# Altium PCB PDM-P00-V00.PcbDoc
Units mil, origin at the board's own origin, x right, y up, seen from the top; angles counter-clockwise.
Board outline 4820.27 x 3160.7 mil, 2 copper layers (Top Layer, Bottom Layer), stack 61.8 mil thick; 69 components, 91 nets, 559 pads, 0 vias.
Unrouted connection lines stored in the file: 383.
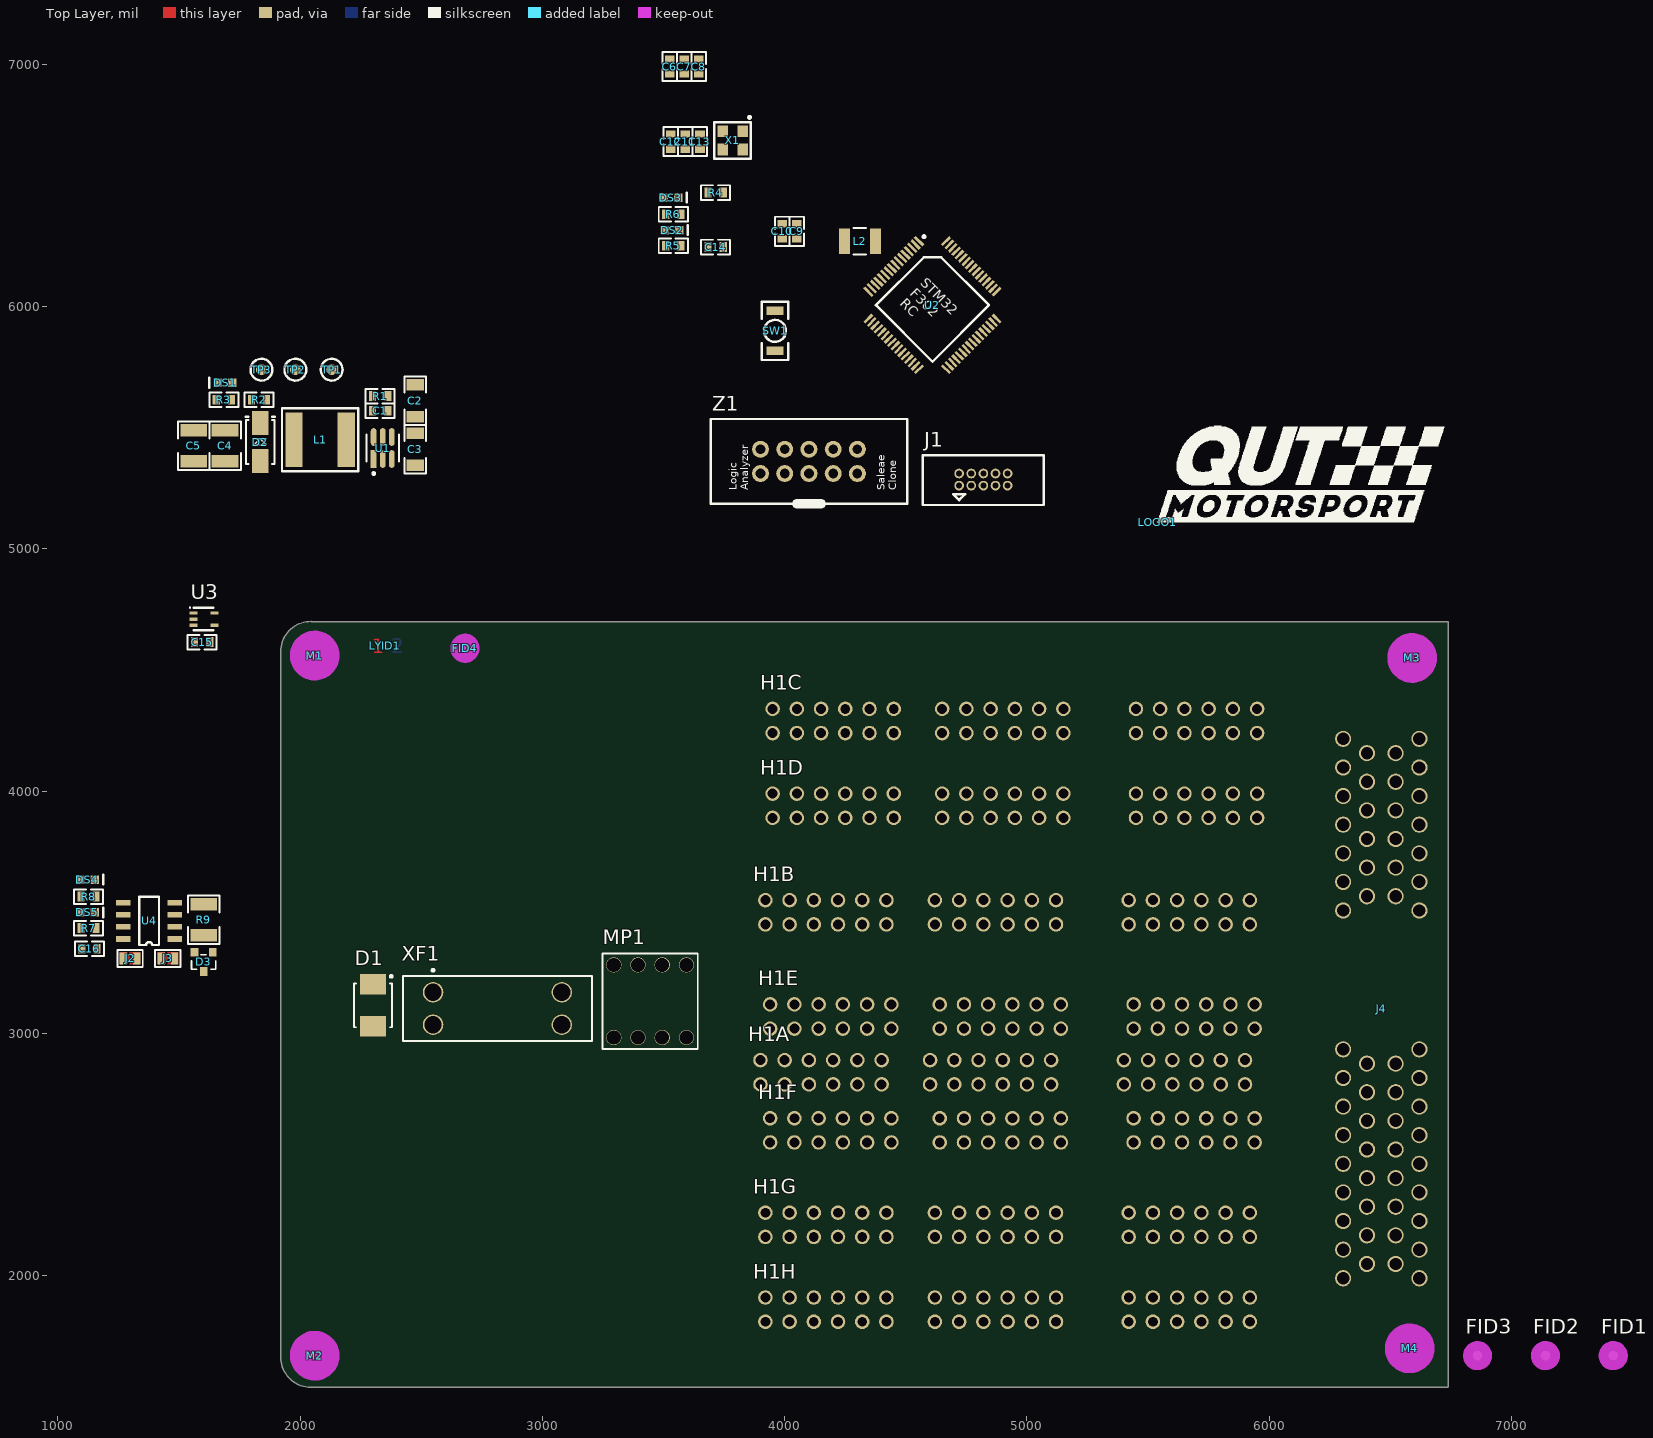
[diagram p0: Top Layer view]
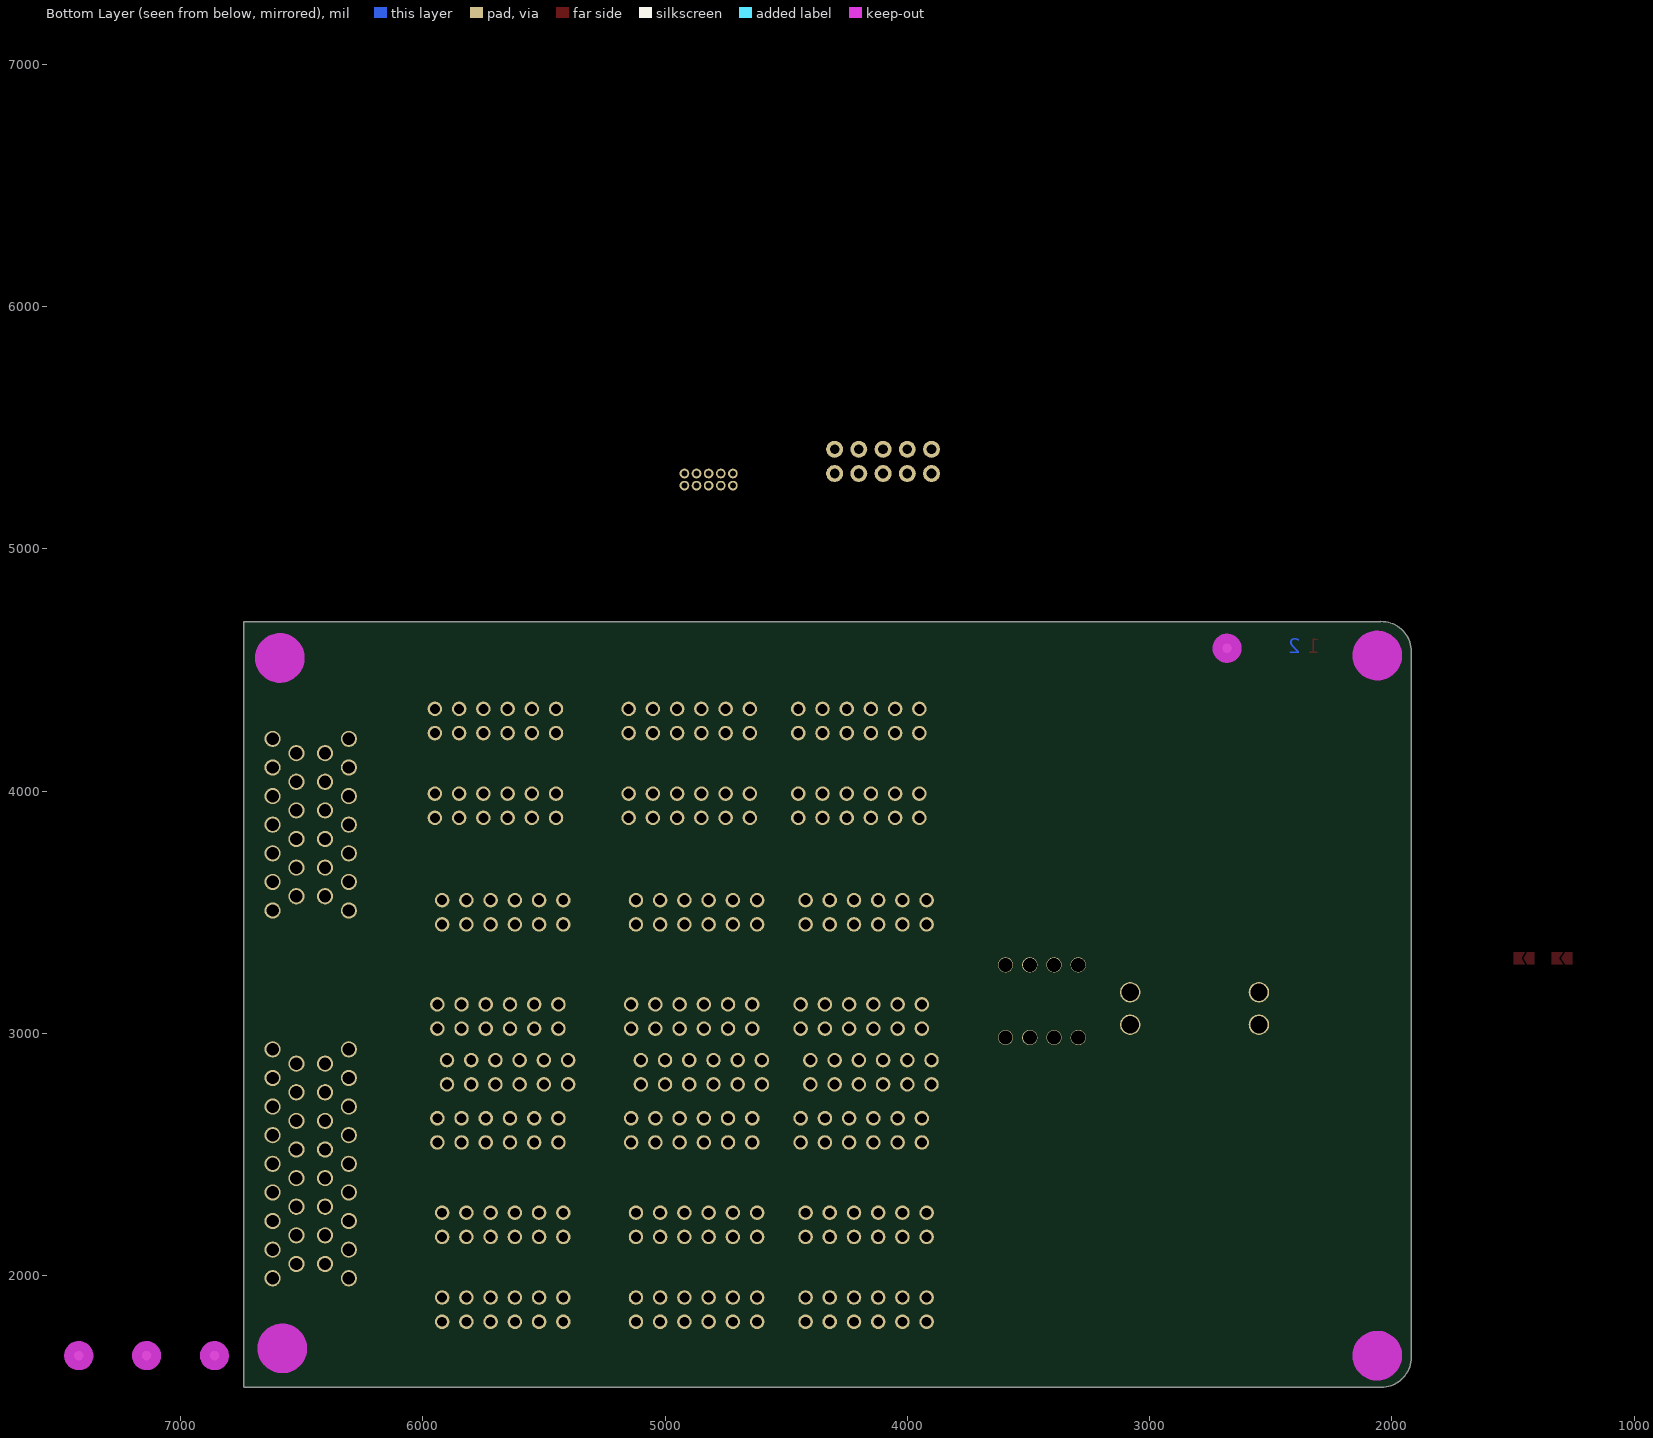
[diagram p1: Bottom Layer view, seen from below]

## Layer stack, top to bottom
Top Solder: solder mask 0.4, Solder Resist, Dk 3.5
Top Layer: signal copper 1.4
Dielectric 1: core 59, Core-043, Dk 4.3
Bottom Layer: signal copper 1.4
Bottom Solder: solder mask 0.4, Solder Resist, Dk 3.5

## Board outline
1919.75,1662.88 cw(c1924.76,1662.88) 1919.98,1664.41 1919.98,4575 cw(c1925,4575) 1920.1,4576.06 cw(c2043.22,4577.34) 2045.15,4700.45 cw(c2045.07,4695.43) 2047.11,4700.02 6735,4700.02 cw(c6735,4695) 6740.02,4695 6740.02,1545 cw(c6735,1545) 6735,1539.99 2044.38,1539.99 cw(c2042.87,1544.77) 2042.87,1539.75 cw(c2042.87,1662.88)

## Design rules (kind name [scope] priority, off if disabled: settings)
Clearance [All] p1: gap=10 ignorepadtopadclearanceinfootprint=FALSE except(0: Arc-Hole Track-Hole SMDPad-Hole THPad-Hole Via-Hole Fill-Hole Poly-Hole Region-Hole Text-Hole)
PolygonConnect [All] p1: connectstyle=Relief reliefconductorwidth=10 reliefentries=4 polygonreliefangle="90 Angle" airgapwidth=10
RoomDefinition PDM-S08-V00-PDMCConnector5 [InComponentClass('PDM-S08-V00-PDMCConnector5')] p1: confinementstyle=ConfineIn formatcopy=TRUE lockcomponents=FALSE outline 975,5041.01 2975,5041.01 2975,6041.01 975,6041.01
RoomDefinition PDM-S08-V00-PDMCConnector4 [InComponentClass('PDM-S08-V00-PDMCConnector4')] p2: confinementstyle=ConfineIn formatcopy=TRUE lockcomponents=FALSE outline 1525,4565.59 1685,4565.59 1685,4775.59 1525,4775.59
RoutingVias [All] p1: holewidth=28 width=50 viastyle="Through Hole" minholewidth=28 minwidth=50 maxholewidth=28 maxwidth=50
SolderMaskExpansion [All] p1: expansion=4 istentingtop=FALSE
Width [All] p1: maxlimit=60 minlimit=10 preferedwidth=20 minimp=50.000000 maximp=50.000000 favimp=50.000000
30 further rules are at their usual default settings.

## Classes and differential pairs
channel class PDM-S08-V00-PDMCConnector: PDM-S08-V00-PDMCConnector1 PDM-S08-V00-PDMCConnector2 PDM-S08-V00-PDMCConnector3 PDM-S08-V00-PDMCConnector4 PDM-S08-V00-PDMCConnector5 PDM-S08-V00-PDMCConnector6 PDM-S08-V00-PDMCConnector7 PDM-S08-V00-PDMCConnector8
net class "INPUT CH[1..7]": "INPUT CH1" "INPUT CH2" "INPUT CH3" "INPUT CH4" "INPUT CH5" "INPUT CH6" "INPUT CH7"
component class PDM-S05-V00-TempSensor: C15 U3
component class PDM-S02-V00-BatteryProtection: D1 MP1 XF1
net class "PDMC CS[1..8]": "PDMC CS1" "PDMC CS2" "PDMC CS3" "PDMC CS4" "PDMC CS5" "PDMC CS6" "PDMC CS7" "PDMC CS8"
net class "PDMC CH4[1..8]": "PDMC CH41" "PDMC CH42" "PDMC CH43" "PDMC CH44" "PDMC CH45" "PDMC CH46" "PDMC CH47" "PDMC CH48"
net class "PDMC CH3[1..8]": "PDMC CH31" "PDMC CH32" "PDMC CH33" "PDMC CH34" "PDMC CH35" "PDMC CH36" "PDMC CH37" "PDMC CH38"
net class "PDMC CH2[1..8]": "PDMC CH21" "PDMC CH22" "PDMC CH23" "PDMC CH24" "PDMC CH25" "PDMC CH26" "PDMC CH27" "PDMC CH28"
net class "PDMC CH1[1..8]": "PDMC CH11" "PDMC CH12" "PDMC CH13" "PDMC CH14" "PDMC CH15" "PDMC CH16" "PDMC CH17" "PDMC CH18"
net class "PDMC ANALOG[1..8]": "PDMC ANALOG1" "PDMC ANALOG2" "PDMC ANALOG3" "PDMC ANALOG4" "PDMC ANALOG5" "PDMC ANALOG6" "PDMC ANALOG7" "PDMC ANALOG8"
component class PDM-S08-V00-PDMCConnector8: H1H
component class PDM-S08-V00-PDMCConnector7: H1G
component class PDM-S08-V00-PDMCConnector6: H1F
component class PDM-S08-V00-PDMCConnector5: H1E
component class PDM-S08-V00-PDMCConnector4: H1D
component class PDM-S08-V00-PDMCConnector3: H1C
component class PDM-S08-V00-PDMCConnector2: H1B
component class PDM-S08-V00-PDMCConnector1: H1A
component class PDM-S03-V00-PSU: C1 C2 C3 C4 C10 D2 DS1 L2 R1 R2 R3 TP1 TP2 TP3 U1
component class PDM-S01-V00-PowerDistributionModule: FID1 FID2 FID3 FID4 LOGO1 LYID1 M1 M2 M3 M4
component class PDM-S04-V00-Microcontroller: C1 C3 C4 C6 C8 C10 C12 DS3 J1 L2 R3 R5 R7 SW1 U3 X1 Z1
component class PDM-S09-V00-HarnessConnector: J3
component class PDM-S06-V00-CAN: C15 D1 DS5 J1 J3 R2 R3 R7 U3

## Components (designator, comment, footprint, x,y, rotation, side; value= is the part's Value field where it differs from the comment)
C1 "100nF 100V" Cap_Ceramic_0603 2330,5571.01 r180 top
C2 "22uF 35V 1206" Cap_Ceramic_1206 2475,5611.01 r90 top
C3 "22uF 35V 1206" Cap_Ceramic_1206 2475,5411.01 r270 top
C4 "47uF 16V 1210" Cap_Ceramic_1210 1690,5426.01 r90 top
C5 "47uF 16V 1210" Cap_Ceramic_1210 1560,5426.01 r90 top
C6 "100nF" Cap_Ceramic_0603 3525,6991.24 r90 top
C7 "100nF" Cap_Ceramic_0603 3585,6991.24 r90 top
C8 "100nF" Cap_Ceramic_0603 3645,6991.24 r90 top
C9 "100nF" Cap_Ceramic_0603 4050,6311.24 r90 top
C10 "4u7" Cap_Ceramic_0603 3990,6311.24 r90 top
C11 "10nF" Cap_Ceramic_0603 3590,6681.24 r270 top
C12 "1uF" Cap_Ceramic_0603 3530,6681.24 r270 top
C13 "100nF" Cap_Ceramic_0603 3650,6681.24 r270 top
C14 "100nF" Cap_Ceramic_0603 3715,6246.24 r180 top
C15 "100nF" Cap_Ceramic_0603 1595,4615.59 r0 top
C16 "100nF" Cap_Ceramic_0603 1130,3350 r0 top
D1 "MURS360BT3G" ONSC-SMB-2-403A-03_V 2300,3116.14 r270 top
D2 "B260A-13-F" SMA 1835,5441.01 r90 top
D3 "NUP2105L" NUP2105L 1601.32,3294.93 r180 top
DS1 "LED Green 0603" "LED GREEN 0603" 1690,5686.01 r180 top
DS2 "LED Orange" "LED ORANGE 0603" 3535,6316.24 r0 top
DS3 "LED Orange" "LED ORANGE 0603" 3530,6450 r0 top
DS4 "LED Blue 0603" "LED BLUE 0603" 1121.32,3634.93 r0 top
DS5 "LED Blue 0603" "LED BLUE 0603" 1121.32,3499.93 r0 top
FID1 "Fiducial 1MM" "FIDUCIAL 1MM" 7420,1670 r0 top
FID2 "Fiducial 1MM" "FIDUCIAL 1MM" 7140,1670 r90 top
FID3 "Fiducial 1MM" "FIDUCIAL 1MM" 6860,1670 r90 top
FID4 "Fiducial 1MM" "FIDUCIAL 1MM" 2680,4590 r90 top
H1A "SSW-106-01" SSW-106-01 3900,2890 r0 top (schematic designator H1)
H1B "SSW-106-01" SSW-106-01 3920,3550 r0 top (schematic designator H1)
H1C "SSW-106-01" SSW-106-01 3950,4340 r0 top (schematic designator H1)
H1D "SSW-106-01" SSW-106-01 3950,3990 r0 top (schematic designator H1)
H1E "SSW-106-01" SSW-106-01 3940,3120 r0 top (schematic designator H1)
H1F "SSW-106-01" SSW-106-01 3940,2650 r0 top (schematic designator H1)
H1G "SSW-106-01" SSW-106-01 3920,2260 r0 top (schematic designator H1)
H1H "SSW-106-01" SSW-106-01 3920,1910 r0 top (schematic designator H1)
J1 "IDC 10P 2x5 1.27mm" "IDC 1.27MM 10P" 4820,5286.24 r0 top
J2 "Jumper 2Way Solderable" Jumper_2Way_Solderable 1270,3310 r270 top
J3 "Jumper 2Way Solderable" Jumper_2Way_Solderable 1426.32,3309.93 r270 top
J4 "3-6437285-2" "SUPER SEAL RIGHT 60POS" 6620,3221.89 r90 top
L1 "74404064221" Inductor_6x6mm 2080,5451.01 r0 top
L2 "10uH" TDK-B82422A1103K100_V 4310,6270 r0 top
LOGO1 "30mm Wide QUTMS Logo" "QUTMS LOGO 30MM" 5540,5110 r0 top
LYID1 "2 Layer Identification PCB Marker" "LAYER IDENT 2" 2350,4600 r0 top
M1 "Hole M3 Tight Unplated" "M3.2 UNPLATED" 2060,4560 r0 top
M2 "Hole M3 Tight Unplated" "M3.2 UNPLATED" 2060,1670 r0 top
M3 "Hole M3 Tight Unplated" "M3.2 UNPLATED" 6590,4550 r0 top
M4 "Hole M3 Tight Unplated" "M3.2 UNPLATED" 6580,1700 r0 top
MP1 "M6x9mm" "7461084_for chemical surfaces" 3444.25,3133.07 r0 top
R1 "64k9 1%" Res_ThinFilm_0603 2330,5631.01 r0 top
R2 "1k" Res_ThinFilm_0603 1830,5616.01 r0 top
R3 "19k6 1%" Res_ThinFilm_0603 1685,5616.01 r0 top
R4 "4k7" Res_ThinFilm_0603 3715,6471.24 r180 top
R5 "330R" Res_ThinFilm_0603 3540,6251.24 r180 top
R6 "330R" Res_ThinFilm_0603 3540,6381.24 r180 top
R7 "330R" Res_ThinFilm_0603 1126.32,3434.93 r0 top
R8 "330R" Res_ThinFilm_0603 1126.32,3564.93 r0 top
R9 "120R 1% 1210" Res_ThinFilm_1210 1601.32,3469.93 r270 top
SW1 "B3U-1000P" "BTN B3U-1000P" 3960,5900 r270 top
TP1 "TestPoint_SMD" TestPointSMD 2130,5740 r0 top
TP2 "TestPoint_SMD" TestPointSMD 1980,5740 r0 top
TP3 "TestPoint_SMD" TestPointSMD 1840,5740 r0 top
U1 "LMR14010" LMR14010 2340,5416.01 r90 top
U2 "STM32F302RC" STM32F302RC 4610,6006.24 r315 top
U3 "TMP235" SC70 1605,4715.59 r0 top
U4 "SN65HVD233" SN65HVD233DR 1376.32,3464.93 r180 top
X1 "DSC1001DI1-008.0000T" DSC1001DI1-008.0000TCT-ND 3785,6686.24 r270 top
XF1 "3557-2" KSTN-3557-2 2814.25,3103.07 r0 top
Z1 "LogicAnalyzerBreakOut" LogicAnalyzer 4100,5361.24 r90 top

## Footprints (in the part's own frame and the unit in brackets; to place one, negate y for a bottom-side part, rotate by r counter-clockwise, add the part's x,y. Pads: shape width x height; smd on the part's side, far side on the other; paste and mask are expansions set on the pad)
"7461084_for chemical surfaces" [mm] "WP-BUTR Bushes with two Rows Pin-Plate, M6, blind 9mm"
  round 1.6 hole 1.475: 1(-3.81,-3.81) 1(-3.81,3.81) 1(-1.27,-3.81) 1(-1.27,3.81) 1(1.27,-3.81) 1(1.27,3.81) 1(3.81,-3.81) 1(3.81,3.81)
  silkscreen extent -5,-5 5,5, body extent -5,-5 5,5, height 13.5
"BTN B3U-1000P" [mil] "OMRON B3U-1000P"
  rect 35x70 smd: 1(-82.68,0) 2(82.68,0)
  silkscreen extent -120,-55 120,55, body extent -79,-49 79,49, height 63
Cap_Ceramic_0603 [mil]
  rect 30x40 smd: 1(-31.24,0) 2(31.24,0)
  silkscreen extent -60,-30 60,30, body extent -31,-16 32,16, height 33
Cap_Ceramic_1206 [mil]
  rect 47x71 smd: 1(-66.08,0) 2(66.08,0)
  silkscreen extent -100,-45 100,45, body extent -63,-31 63,32, height 53
Cap_Ceramic_1210 [mm]
  rect 1.3x2.8 smd: 1(-1.625,0) 2(1.625,0)
  silkscreen extent -2.54,-1.65 2.54,1.65, body extent -1.6,-1.25 1.6,1.25, height 1.35
DSC1001DI1-008.0000TCT-ND [mil]
  rect 48x43 smd: 1(-37.4,41.34) 2(37.4,41.34) 3(37.4,-41.34) 4(-37.4,-41.34)
  silkscreen extent -100,-75 75,75, body extent -49,-63 49,63, height 33
"FIDUCIAL 1MM" [mm]
  round 1 smd mask+1: 1(0,0)
  round 1 smd far side mask+1: 1(0,0)
  Keep-Out Layer circle w1.524: c0,0 r0.762
"IDC 1.27MM 10P" [mil]
  round 40 hole 25: 1(-100,-25) 2(-100,25) 3(-50,-25) 4(-50,25) 5(0,-25) 6(0,25) 7(50,-25) 8(50,25) 9(100,-25) 10(100,25)
  silkscreen extent -250,-105 250,100, body extent -249,-104 249,100, height 214
Inductor_6x6mm [mm]
  rect 1.8x5.7 smd: 1(-2.667,0) 2(2.794,0)
  silkscreen extent -3.94,-3.3 4.06,3.3, body extent -3,-3 3,3, height 4.56
Jumper_2Way_Solderable [mil]
  rect 50x30 smd: 1(0,55) 2(0,0)
  Top Layer region: -25,25 0,40 25,25 25,70 -25,70
  Top Layer region: -25,15 0,30 25,15 25,-15 0,-15 -25,-15
  silkscreen extent -35,-25 35,80
KSTN-3557-2 [mm] "Fuse Holder, PCB Mount, Thru-Hole, Body 19.8x6.8mm, Height 7.4mm"
  round 2.15 hole 1.8: 1(-6.75,1.7) 2(-6.75,-1.7) 3(6.75,1.7) 4(6.75,-1.7)
  silkscreen extent -9.9,-3.4 9.9,4.12, body extent -9.91,-3.37 9.91,3.37, height 7.74
"LAYER IDENT 2" [mil]
  Top Layer pour cut-out: -20,-5
  Top Layer pour cut-out: -10,30
  Top Layer pour cut-out: -90,50 -90,-50 90,-50 90,50
  Top Layer pour cut-out: 190,150
  Bottom Layer pour cut-out: -90,50 -90,-50 90,-50 90,50
"LED BLUE 0603" [mil]
  rect 35x35 smd: 1(-30,0) 2(30,0)
  silkscreen extent 65,-20 65,20, body extent -40,-20 40,20, height 30
"LED GREEN 0603" [mil]
  rect 35x35 smd: 1(-30,0) 2(30,0)
  silkscreen extent 65,-20 65,20, body extent -40,-20 40,20, height 30
"LED ORANGE 0603" [mil]
  rect 35x35 smd: 1(-30,0) 2(30,0)
  silkscreen extent 65,-20 65,20, body extent -40,-20 40,20, height 30
LMR14010 [mil]
  rect 73.01x24.1 smd paste+0 mask+0: 1(-44.73,36.75)
  rrect100% 73.01x24.1 smd paste+0 mask+0: 2(-44.73,-0.65) 3(-44.73,-38.05) 4(45.84,-38.05) 5(45.84,-0.65) 6(45.84,36.75)
  silkscreen extent -110,-68 56,66, body extent -101,-77 102,76, height 10
LogicAnalyzer [mil]
  round 70 hole 40: 1(-50,200) 2(50,200) 3(-50,100) 4(50,100) 5(-50,0) 6(50,0) 7(-50,-100) 8(50,-100) 9(-50,-200) 10(50,-200)
  silkscreen extent -175,-405 175,405, body extent -175,-404 175,404, height 359
"M3.2 UNPLATED" [mm]
  round 0 hole 3.2 unplated mask+2.6: 1(0,0)
  Keep-Out Layer circle w2.667: c0,0 r1.27
NUP2105L [mm]
  rect 0.8x0.9 smd: 1(-0.95,-1) 2(0.95,-1) 3(0,1)
  silkscreen extent -1.27,-0.76 1.27,0.76, body extent -1.45,-1.22 1.45,1.18, height 1
ONSC-SMB-2-403A-03_V [mil] "Molded, 2-Leads, Body 4.6x3.95mm"
  rect 85x107.99 smd: 1(-87.01,0) 2(87.01,0)
  silkscreen extent -125,-79 91,81, body extent -91,-78 91,78, height 97
"QUTMS LOGO 30MM" [mil]
  silkscreen extent -1,1 1182,398
Res_ThinFilm_0603 [mil]
  rect 30x40 smd: 1(-31.24,0) 2(31.24,0)
  silkscreen extent -60,-30 60,30, body extent -31,-16 32,16, height 18
Res_ThinFilm_1210 [mm]
  rect 1.3x2.8 smd: 1(-1.625,0) 2(1.625,0)
  silkscreen extent -2.54,-1.65 2.54,1.65, body extent -1.6,-1.25 1.6,1.25, height 0.6
SC70 [mm] "SC70, 5-leads"
  rect 0.85x0.35 smd: 1(-1.143,0.508) 2(-1.143,-0.142) 3(-1.143,-0.792) 4(1.057,-0.792) 5(1.057,0.508)
  silkscreen extent -1.59,-1.32 0.94,1.13, body extent -1.14,-1.13 0.96,0.87, height 0.9
SMA [mm]
  rect 2.5x1.7 smd: A(-2,0) K(2,0)
  silkscreen extent -2.3,-1.52 2.67,1.52, body extent -2.52,-1.46 2.52,1.46, height 2.4
SN65HVD233DR [mm]
  rect 1.55x0.6 smd: 1(-2.7,1.903) 2(-2.7,0.633) 3(-2.7,-0.637) 4(-2.7,-1.907) 5(2.7,-1.907) 6(2.7,-0.637) 7(2.7,0.633) 8(2.7,1.903)
  silkscreen extent -1.04,-2.54 1.04,2.54, body extent -3.01,-2.45 3.01,2.45, height 1.63
SSW-106-01 [mil]
  round 60 hole 40.94: A1(0,0) A2(100,0) A3(200,0) A4(300,0) A5(400,0) A6(500,0) B1(0,-100) B2(100,-100) B3(200,-100) B4(300,-100) B5(400,-100) B6(500,-100) C1(700,0) C2(800,0) C3(900,0) C4(1000,0) C5(1100,0) C6(1200,0) D1(700,-100) D2(800,-100) D3(900,-100) D4(1000,-100) D5(1100,-100) D6(1200,-100) E1(1500,0) E2(1600,0) E3(1700,0) E4(1800,0) E5(1900,0) E6(2000,0) F1(1500,-100) F2(1600,-100) F3(1700,-100) F4(1800,-100) F5(1900,-100) F6(2000,-100)
  body extent -60,-147 2060,48, height 335
STM32F302RC [mm]
  rect 1.3x0.3 smd: 1(-5.75,3.75) 2(-5.75,3.25) 3(-5.75,2.75) 4(-5.75,2.25) 5(-5.75,1.75) 6(-5.75,1.25) 7(-5.75,0.75) 8(-5.75,0.25) 9(-5.75,-0.25) 10(-5.75,-0.75) 11(-5.75,-1.25) 12(-5.75,-1.75) 13(-5.75,-2.25) 14(-5.75,-2.75) 15(-5.75,-3.25) 16(-5.75,-3.75)
  rect 0.3x1.2 smd: 17(-3.75,-5.75) 18(-3.25,-5.75) 19(-2.75,-5.75) 20(-2.25,-5.75) 21(-1.75,-5.75) 22(-1.25,-5.75) 23(-0.75,-5.75) 24(-0.25,-5.75) 25(0.25,-5.75) 26(0.75,-5.75) 27(1.25,-5.75) 28(1.75,-5.75) 29(2.25,-5.75) 30(2.75,-5.75) 31(3.25,-5.75) 32(3.75,-5.75) 49(3.75,5.75) 50(3.25,5.75) 51(2.75,5.75) 52(2.25,5.75) 53(1.75,5.75) 54(1.25,5.75) 55(0.75,5.75) 56(0.25,5.75) 57(-0.25,5.75) 58(-0.75,5.75) 59(-1.25,5.75) 60(-1.75,5.75) 61(-2.25,5.75) 62(-2.75,5.75) 63(-3.25,5.75) 64(-3.75,5.75)
  rect 1.2x0.3 smd: 33(5.75,-3.75) 34(5.75,-3.25) 35(5.75,-2.75) 36(5.75,-2.25) 37(5.75,-1.75) 38(5.75,-1.25) 39(5.75,-0.75) 40(5.75,-0.25) 41(5.75,0.25) 42(5.75,0.75) 43(5.75,1.25) 44(5.75,1.75) 45(5.75,2.25) 46(5.75,2.75) 47(5.75,3.25) 48(5.75,3.75)
  silkscreen extent -5.84,-4.19 4.19,4.57, body extent -6.07,-6.07 6.07,6.07, height 1.6
"SUPER SEAL RIGHT 60POS" [mm]
  round 1.7 hole 1.3: A1(-31.304,8) A2(-28.304,8) A3(-25.304,8) A4(-22.304,8) A5(-19.304,8) A6(-16.304,8) A7(-13.304,8) A8(-10.304,8) A9(-7.304,8) A10(-29.804,5.5) A11(-26.804,5.5) A12(-23.804,5.5) A13(-20.804,5.5) A14(-17.804,5.5) A15(-14.804,5.5) A16(-11.804,5.5) A17(-8.804,5.5) A18(-29.804,2.5) A19(-26.804,2.5) A20(-23.804,2.5) A21(-20.804,2.5) A22(-17.804,2.5) A23(-14.804,2.5) A24(-11.804,2.5) A25(-8.804,2.5) A26(-31.304,0) A27(-28.304,0) A28(-25.304,0) A29(-22.304,0) A30(-19.304,0) A31(-16.304,0) A32(-13.304,0) A33(-10.304,0) A34(-7.304,0) B1(7.25,8) B2(10.25,8) B3(13.25,8) B4(16.25,8) B5(19.25,8) B6(22.25,8) B7(25.25,8) B8(8.75,5.5) B9(11.75,5.5) B10(14.75,5.5) B11(17.75,5.5) B12(20.75,5.5) B13(23.75,5.5) B14(8.75,2.5) B15(11.75,2.5) B16(14.75,2.5) B17(17.75,2.5) B18(20.75,2.5) B19(23.75,2.5) B20(7.25,0) B21(10.25,0) B22(13.25,0) B23(16.25,0) B24(19.25,0) B25(22.25,0) B26(25.25,0)
  body extent -42,-26 36,10.5, height 24.62
TDK-B82422A1103K100_V [mm] "Molded Inductor, 2-Leads, Body 3.5x2.8mm"
  rect 1.15x2.7 smd: 1(-1.625,0) 2(1.625,0)
  silkscreen extent -0.65,-1.4 0.65,1.4, body extent -1.97,-1.4 1.97,1.4, height 2.1
TestPointSMD [mil]
  round 45 smd: 1(0,0)
  silkscreen extent -45,-45 45,45

## Part data
C1: library part "100nF 100V 5% X7R 0603", "Capacitor, Ceramic, SMD, 100nF, 100V, 5%, X7R, 0603"
C2 C3: library part "22uF 35V 10% X7R 1206", "Capacitor, Ceramic, SMD, 22uF, 35V, 10%, X7R, 1206"
C4 C5: library part "47uF 16V 10% X7R 1210", "Capacitor, Ceramic, SMD, 47uF, 16V, 5%, X7R, 1210"
C6 C7 C8 C9 C13 C14 C15 C16: library part "100nF 50V 5% X7R 0603", "Capacitor, Ceramic, SMD, 100nF, 50V, 5%, X7R, 0603"
C10: library part "4u7 50V 5% X7R 0603", "Capacitor, Ceramic, SMD, 4u7, 50V, 5%, X7R, 0603"
C11: library part "10nF 50V 5% X7R 0603", "Capacitor, Ceramic, SMD, 10nF, 50V, 5%, X7R, 0603"
C12: library part "1uF 25V 5% X7R 0603", "Capacitor, Ceramic, SMD, 1uF, 25V, 5%, X7R, 0603"
D1: library part CMP-0902-00327-1, "Surface Mount Ultrafast Power Rectifier, 2-Pin SMB, Pb-Free, Tape and Reel", Manufacturer="On Semiconductor", ComponentLink1Description="Manufacturer URL", ComponentLink1URL=http://www.onsemi.com/, ComponentLink2Description=Datasheet, ComponentLink2URL=http://www.onsemi.cn/pub_link/Collateral/MURS360BT3-D.PDF, ComponentLink3Description="Package Specification", ComponentLink3URL=http://www.onsemi.com/pub_link/Collateral/403A-03.PDF, DatasheetVersion="Rev. 5", IFSM Max (A)=100, Mounting Technology="Surface Mount", PackageDescription="2-Pin Small Molded Package, J-Bend Lead, Body 4.33 x 3.625 mm", PackageReference=SMB-2-403A-03, PackageVersion="Rev. J, 07/2012", Packing="Tape and Reel", PartNumber=MURS360BT3G, RoHS=TRUE, Type=Ultrafast, VRRM Max (V)=600
D2: "Diode, Schottky Barrier Rectifier, 60 V, 2 A, B260A-13-F"
DS2 DS3: library part "LED ORANGE 0603"
DS4 DS5: library part "LED BLUE 0603"
H1A H1B H1C H1D H1E H1F H1G H1H: "CONN RCPT 12POS 0.1 TIN PCB", ComponentLink1Description=Datasheet, ComponentLink1URL=http://suddendocs.samtec.com/catalog_english/ssw_th.pdf, ComponentLink2Description=Digikey, ComponentLink2URL=https://www.digikey.com.au/product-detail/en/samtec-inc/SSW-106-01-T-D/SAM1212-06-ND/1112250
J2 J3: library part "Jumper 2Way Side Solderable", "Jumper 2Way Side Solderable"
J4: "Connector Header Through Hole, Right Angle 60 position 0.118\" (3.00mm), 1.00mm contacts", ComponentLink1Description=Manufacturer, ComponentLink1URL=https://www.te.com/global-en/product-3-6437285-2.html
L1: "FIXED IND 220UH 660MA 850 MOHM", ComponentLink1Description=Digikey, ComponentLink1URL=https://www.digikey.com.au/product-detail/en/w%C3%BCrth-elektronik/74404064221/732-7261-1-ND/5353241, ComponentLink2Description="LCSC A", ComponentLink2URL=https://lcsc.com/product-detail/Power-Inductors_Sunlord-SWPA6045S221MT_C91047.html, ComponentLink3Description="LCSC B", ComponentLink3URL=https://lcsc.com/product-detail/Power-Inductors_SXN-Shun-Xiang-Nuo-Elec-SMNR6045-221MT_C467145.html
L2: library part CMP-2000-05912-1, "Wirewound Inductor, 10 uF, +/- 10%, 180 mA, -55 to 125 degC, 2-Pin SMD, RoHS, Tape and Reel", Current - Saturation=-, Current Rating=180mA, DC Resistance (DCR)=1.6OhmMax, Frequency - Self Resonant=25MHz, Frequency - Test=1MHz, Inductance=10µH, Manufacturer=EPCOS-(TDK), Package / Case=1210(3225Metric), Package Description="2-Pin Surface Mount Device, Body 3.2 x 2.5 mm", Package Reference=B82422A1103K100, Q @ Freq=27@2.52MHz, Ratings=AEC-Q200, Tolerance=±10%, Category=Inductors,Coils,Chokes, Datasheet URL=https://en.tdk.eu/inf/30/db/ind_2008/b82422a_100.pdf, Datasheet Version=10/2012, Family=FixedInductors, Height - Seated (Max)="0.083\"(2.10mm)", Manufacturer URL=http://www.tdk.com/, Material - Core=Ferrite, Mounting Technology=SurfaceMount, Mounting Type=SurfaceMount, Operating Temperature=-, Packaging=CutTape(CT), Series=SIMID, Shielding=Unshielded, Size / Dimension="0.126\"Lx0.098\"W(3.20mmx2.50mm)", Type=Wirewound
LOGO1: library part "QUTMS Logo 30mm"
LYID1: library part "Layer Identification 2"
M1 M2 M3 M4: "M3.2 Hole, No Plating"
MP1: library part 7461084, "WP-BUTR Press-Fit with Internal thread, two rows, 10x10mm, 8 pins, M6x9mm, 160A", Operating Temperature="-55 to +150degC", Rated Current=160A, ComponentLink1Description=Manufacturer, ComponentLink1URL=http://www.we-online.de, ComponentLink2Description=Datasheet, ComponentLink2URL=https://katalog.we-online.com/em/datasheet/7461084.pdf, Height=13.5mm, Material=Brass, Mounting Technology=Press-Fit, Packaging=Bulk, Part Number=7461084, Pin Number=8, Published Date="September 2019", Publisher="Wurth Elektronik", Size=10x10mm, Surface=Tin, Thread=M6, Thread Length=9mm
R1: library part "64k9 1% 0603", "Resistor, SMD, 64k9, 0.1W, 5%, 0603"
R2: library part "1k 5% 0603", "Resistor, SMD, 1k, 0.1W, 5%, 0603"
R3: library part "19k6 1% 0603", "Resistor, SMD, 19k6, 0.1W, 5%, 0603"
R4: library part "4k7 5% 0603", "Resistor, SMD, 4k7, 0.1W, 5%, 0603"
R5 R6 R7 R8: library part "330R 5% 0603", "Resistor, SMD, 330R, 0.1W, 5%, 0603"
R9: "Resistor, SMD, 120R, 0.25W, 1%, 1210"
SW1: library part "BTN B3U-1000P", "Omron B3U-1000P Ultra Miniture Switch", ComponentLink1Description=LCSC, ComponentLink1URL=https://lcsc.com/product-detail/Tactile-Switches_BRIGHT-TSA063G50-250_C294565.html
U2: "ARM® Cortex®-M4 STM32F3 Microcontroller IC 32-Bit 72MHz 256KB (256K x 8) FLASH 64-LQFP (10x10)", ComponentLink1Description=Datasheet, ComponentLink1URL=https://www.st.com/resource/en/datasheet/stm32f302rc.pdf, ComponentLink2Description=Digikey, ComponentLink2URL=https://www.digikey.com.au/product-detail/en/stmicroelectronics/STM32F302RCT6TR/497-19000-1-ND/9974332
U3: "TMP235, Low-Power, High-Accuracy Analog Output Temperature Sensor", ComponentLink1Description=Datasheet, ComponentLink1URL=https://www.ti.com/lit/ds/symlink/tmp235.pdf?HQS=TI-null-null-digikeymode-df-pf-null-wwe&ts=1595645947985, ComponentLink2Description=Digikey, ComponentLink2URL=https://www.digikey.com.au/product-detail/en/texas-instruments/TMP235A4DCKR/296-50016-1-ND/9462854
X1: "8MHz XO (Standard) CMOS Oscillator 1.8 ~ 3.3V Standby (Power Down) 4-SMD, No Lead"
XF1: library part CMP-2000-05461-1, "FUSE HOLDER, PCB MOUNT, 500VAC, 20A, ROHS", Current Rating=30A, Manufacturer=Keystone-Electronics, Voltage=500V, Category=CircuitProtection, Contact Finish=TinNickel, Contact Material=Brass, Datasheet URL=http://datasheet.octopart.com/3557-2-Keystone-datasheet-15715937.pdf, Datasheet Version=Apr-13, Family=Fuseholders, For Use With/Related Products=ATC,ATO257,MINI897, Fuse Size="0.43\"Lx0.15\"Wx0.64\"H(10.92mmx3.81mmx16.25mm)", Fuse Type=Blade, Fuseholder Type=Block, Manufacturer URL=http://www.keyelco.com/, Mounting Type=PCB, Number of Circuits=1, Orientation=Vertical, Series=-, Termination Style=PCPin
Z1: library part LogicAnalyer
D3: ComponentLink1Description=Datasheet, ComponentLink1URL=https://www.onsemi.cn/PowerSolutions/document/NUP2105L-D.PDF, ComponentLink2Description=LCSC, ComponentLink2URL=https://lcsc.com/product-detail/TVS_ON-Semiconductor-NUP2105LT1G_C14486.html, ComponentLink3Description=Digikey, ComponentLink3URL=https://www.digikey.com.au/product-detail/en/on-semiconductor/SZNUP2105LT1G/SZNUP2105LT1GOSCT-ND/3487669
U4: ComponentLink1Description=LCSC, ComponentLink1URL=https://lcsc.com/product-detail/CAN-ICs_Texas-Instruments_SN65HVD233DRG4_Texas-Instruments-Texas-Instruments-SN65HVD233DRG4_C61643.html, ComponentLink2Description=Digikey, ComponentLink2URL=https://www.digikey.com.au/product-detail/en/texas-instruments/SN65HVD233DR/296-35967-1-ND/4134960, ComponentLink3Description=Datasheet, ComponentLink3URL=https://www.ti.com/lit/ds/symlink/sn65hvd233.pdf?ts=1588560888178, ComponentLink4Description="Ti Product Page", ComponentLink4URL=https://www.ti.com/product/SN65HVD233

## Nets (pads, with @x,y where several pads share a name; then routed paths per layer and width w, separated by ;. In a path a pad name is that pad's centre, name@x,y a point inside that pad or via, vN(x,y) a via of type N, cw(c..) or ccw(c..) an arc to the next point about the centre after c; other vN are vias at no path point)
3V3: C4.2 C5.2 C6.2 C7.2 C8.2 C9.2 C10.2 C13.2 C15.2 C16.2 H1A.C6 H1B.C6 H1C.C6 H1D.C6 H1E.C6 H1F.C6 H1G.C6 H1H.C6 J1.1 J2.1 L1.2 L2.1 R1.2 R2.2 R4.2 R5.2 R6.2 TP1.1 U2.1 U2.19 U2.32 U2.48 U2.64 U3.4 U4.3 X1.1 X1.4
"3V3 L": DS1.1 R2.1
"CAN H": D3.2 J3.1 J4.B25 U4.7
"CAN L": D3.1 J4.B26 R9.1 U4.6
"CAN LED": DS4.1 DS5.1 J2.2
"CAN RX": R8.1 U2.44 U4.4 Z1.4
"CAN RX LED": DS5.2 R8.2
"CAN TERM": J3.2 R9.2
"CAN TX": R7.1 U2.45 U4.1 Z1.3
"CAN TX LED": DS4.2 R7.2
GND: C2.1 C3.1 C4.1 C5.1 C6.1 C7.1 C8.1 C9.1 C10.1 C11.1 C12.1 C13.1 C14.1 C15.1 C16.1 D1.2 D2.A D3.3 DS1.2 H1A.C5 H1A.D5 H1B.C5 H1B.D5 H1C.C5 H1C.D5 H1D.C5 H1D.D5 H1E.C5 H1E.D5 H1F.C5 H1F.D5 H1G.C5 H1G.D5 H1H.C5 H1H.D5 J1.3 J1.5 J1.9 R3.1 SW1.1 U1.2 U2.12 U2.31 U2.47 U2.63 U3.1 U3.2 U3.5 U4.2 U4.8 X1.2 Z1.10
"INPUT CH1": J4.B1
"INPUT CH2": J4.B2
"INPUT CH3": J4.B3
"INPUT CH4": J4.B4
"INPUT CH5": J4.B5
"INPUT CH6": J4.B6
"INPUT CH7": J4.B7
LED0: DS2.2
LED1: DS3.2
LHI: H1A.D6 H1B.D6 H1C.D6 H1D.D6 H1E.D6 H1F.D6 H1G.D6 H1H.D6
MISOA: H1A.C2 H1B.C2 H1C.C2 H1D.C2 H1E.C2 H1F.C2 H1G.C2 H1H.C2 U2.22
MOSIA: H1A.C1 H1B.C1 H1C.C1 H1D.C1 H1E.C1 H1F.C1 H1G.C1 H1H.C1 U2.23
NetC11_2: C11.2 C12.2 L2.2 U2.13
NetDS2_1: DS2.1 R5.1
NetDS3_1: DS3.1 R6.1
NetU2_21: U2.21
NRST: C14.2 J1.10 R4.1 SW1.2 U2.7
"OSC IN": U2.5 X1.3
"PDMC ANALOG1": H1A.D4
"PDMC ANALOG2": H1B.D4
"PDMC ANALOG3": H1C.D4
"PDMC ANALOG4": H1D.D4
"PDMC ANALOG5": H1E.D4
"PDMC ANALOG6": H1F.D4
"PDMC ANALOG7": H1G.D4
"PDMC ANALOG8": H1H.D4
"PDMC CH11": H1A.E1 H1A.E2 H1A.E3 J4.A1
"PDMC CH12": H1B.E1 H1B.E2 H1B.E3 J4.A2
"PDMC CH13": H1C.E1 H1C.E2 H1C.E3 J4.A3
"PDMC CH14": H1D.E1 H1D.E2 H1D.E3 J4.A4
"PDMC CH15": H1E.E1 H1E.E2 H1E.E3 J4.A5
"PDMC CH16": H1F.E1 H1F.E2 H1F.E3 J4.A6
"PDMC CH17": H1G.E1 H1G.E2 H1G.E3 J4.A7
"PDMC CH18": H1H.E1 H1H.E2 H1H.E3 J4.A8
"PDMC CH21": H1A.E4 H1A.E5 H1A.E6 J4.A10
"PDMC CH22": H1B.E4 H1B.E5 H1B.E6 J4.A11
"PDMC CH23": H1C.E4 H1C.E5 H1C.E6 J4.A12
"PDMC CH24": H1D.E4 H1D.E5 H1D.E6 J4.A13
"PDMC CH25": H1E.E4 H1E.E5 H1E.E6 J4.A14
"PDMC CH26": H1F.E4 H1F.E5 H1F.E6 J4.A15
"PDMC CH27": H1G.E4 H1G.E5 H1G.E6 J4.A16
"PDMC CH28": H1H.E4 H1H.E5 H1H.E6 J4.A17
"PDMC CH31": H1A.F4 H1A.F5 H1A.F6 J4.A18
"PDMC CH32": H1B.F4 H1B.F5 H1B.F6 J4.A19
"PDMC CH33": H1C.F4 H1C.F5 H1C.F6 J4.A20
"PDMC CH34": H1D.F4 H1D.F5 H1D.F6 J4.A21
"PDMC CH35": H1E.F4 H1E.F5 H1E.F6 J4.A22
"PDMC CH36": H1F.F4 H1F.F5 H1F.F6 J4.A23
"PDMC CH37": H1G.F4 H1G.F5 H1G.F6 J4.A24
"PDMC CH38": H1H.F4 H1H.F5 H1H.F6 J4.A25
"PDMC CH41": H1A.F1 H1A.F2 H1A.F3 J4.A26
"PDMC CH42": H1B.F1 H1B.F2 H1B.F3 J4.A27
"PDMC CH43": H1C.F1 H1C.F2 H1C.F3 J4.A28
"PDMC CH44": H1D.F1 H1D.F2 H1D.F3 J4.A29
"PDMC CH45": H1E.F1 H1E.F2 H1E.F3 J4.A30
"PDMC CH46": H1F.F1 H1F.F2 H1F.F3 J4.A31
"PDMC CH47": H1G.F1 H1G.F2 H1G.F3 J4.A32
"PDMC CH48": H1H.F1 H1H.F2 H1H.F3 J4.A33
"PDMC CS1": H1A.C4
"PDMC CS2": H1B.C4
"PDMC CS3": H1C.C4
"PDMC CS4": H1D.C4
"PDMC CS5": H1E.C4
"PDMC CS6": H1F.C4
"PDMC CS7": H1G.C4
"PDMC CS8": H1H.C4
"PWR CB": C1.1 U1.1
"PWR FB": R1.1 R3.2 TP3.1 U1.3
"PWR SW": C1.2 D2.K L1.1 TP2.1 U1.6
S0: H1A.D1 H1B.D1 H1C.D1 H1D.D1 H1E.D1 H1F.D1 H1G.D1 H1H.D1
S1: H1A.D2 H1B.D2 H1C.D2 H1D.D2 H1E.D2 H1F.D2 H1G.D2 H1H.D2
S2: H1A.D3 H1B.D3 H1C.D3 H1D.D3 H1E.D3 H1F.D3 H1G.D3 H1H.D3
SCKA: H1A.C3 H1B.C3 H1C.C3 H1D.C3 H1E.C3 H1F.C3 H1G.C3 H1H.C3
SWCLK: J1.4 U2.49
SWDIO: J1.2 U2.46
"TEMP SENSE": U3.3
"USART1 RX": Z1.2
"USART1 TX": Z1.1
VBAT: MP1.1 XF1.1 XF1.2
VCC: C2.2 C3.2 D1.1 H1A.A1 H1A.A2 H1A.A3 H1A.A4 H1A.A5 H1A.A6 H1A.B1 H1A.B2 H1A.B3 H1A.B4 H1A.B5 H1A.B6 H1B.A1 H1B.A2 H1B.A3 H1B.A4 H1B.A5 H1B.A6 H1B.B1 H1B.B2 H1B.B3 H1B.B4 H1B.B5 H1B.B6 H1C.A1 H1C.A2 H1C.A3 H1C.A4 H1C.A5 H1C.A6 H1C.B1 H1C.B2 H1C.B3 H1C.B4 H1C.B5 H1C.B6 H1D.A1 H1D.A2 H1D.A3 H1D.A4 H1D.A5 H1D.A6 H1D.B1 H1D.B2 H1D.B3 H1D.B4 H1D.B5 H1D.B6 H1E.A1 H1E.A2 H1E.A3 H1E.A4 H1E.A5 H1E.A6 H1E.B1 H1E.B2 H1E.B3 H1E.B4 H1E.B5 H1E.B6 H1F.A1 H1F.A2 H1F.A3 H1F.A4 H1F.A5 H1F.A6 H1F.B1 H1F.B2 H1F.B3 H1F.B4 H1F.B5 H1F.B6 H1G.A1 H1G.A2 H1G.A3 H1G.A4 H1G.A5 H1G.A6 H1G.B1 H1G.B2 H1G.B3 H1G.B4 H1G.B5 H1G.B6 H1H.A1 H1H.A2 H1H.A3 H1H.A4 H1H.A5 H1H.A6 H1H.B1 H1H.B2 H1H.B3 H1H.B4 H1H.B5 H1H.B6 U1.4 U1.5 XF1.3 XF1.4
pads on no net: FID1.1 FID2.1 FID3.1 FID4.1 J1.6 J1.7 J1.8 J4.A9 J4.A34 J4.B8 J4.B9 J4.B10 J4.B11 J4.B12 J4.B13 J4.B14 J4.B15 J4.B16 J4.B17 J4.B18 J4.B19 J4.B20 J4.B21 J4.B22 J4.B23 J4.B24 M1.1 M2.1 M3.1 M4.1 U2.2 U2.3 U2.4 U2.6 U2.8 U2.9 U2.10 U2.11 U2.14 U2.15 U2.16 U2.17 U2.18 U2.20 U2.24 U2.25 U2.26 U2.27 U2.28 U2.29 U2.30 U2.33 U2.34 U2.35 U2.36 U2.37 U2.38 U2.39 U2.40 U2.41 U2.42 U2.43 U2.50 U2.51 U2.52 U2.53 U2.54 U2.55 U2.56 U2.57 U2.58 U2.59 U2.60 U2.61 U2.62 U4.5 Z1.5 Z1.6 Z1.7 Z1.8 Z1.9

## Silkscreen, mask and mechanical layers (free items; w line width, h text height)
Mechanical 1:
  lines w10: 1924.76,1662.88 ccw(c2042.87,1662.88) 2042.87,1544.77 ; 1925,1660 1925,4575 ; 1925.12,4575.49 cw(c2043.22,4577.34) 2045.07,4695.43 ; 2040,1545 6735,1545 6735,4695 2045,4695

## Text inside footprints (layer, text, board x,y; h text height)
LYID1: Top Layer "1" at 2295,4570 h60; Bottom Layer "2" at 2375,4570 h60
U2: Top Overlay "STM32 / F302 / RC" at 4471.86,6009.52 h40 r315
Z1: Top Overlay "Logic / Analyzer" at 3850,5241.24 h32 r90; Top Overlay "Saleae / Clone" at 4460,5241.24 h32 r90